# EAGLE board PowerBoard (EAGLE 9.2.1)
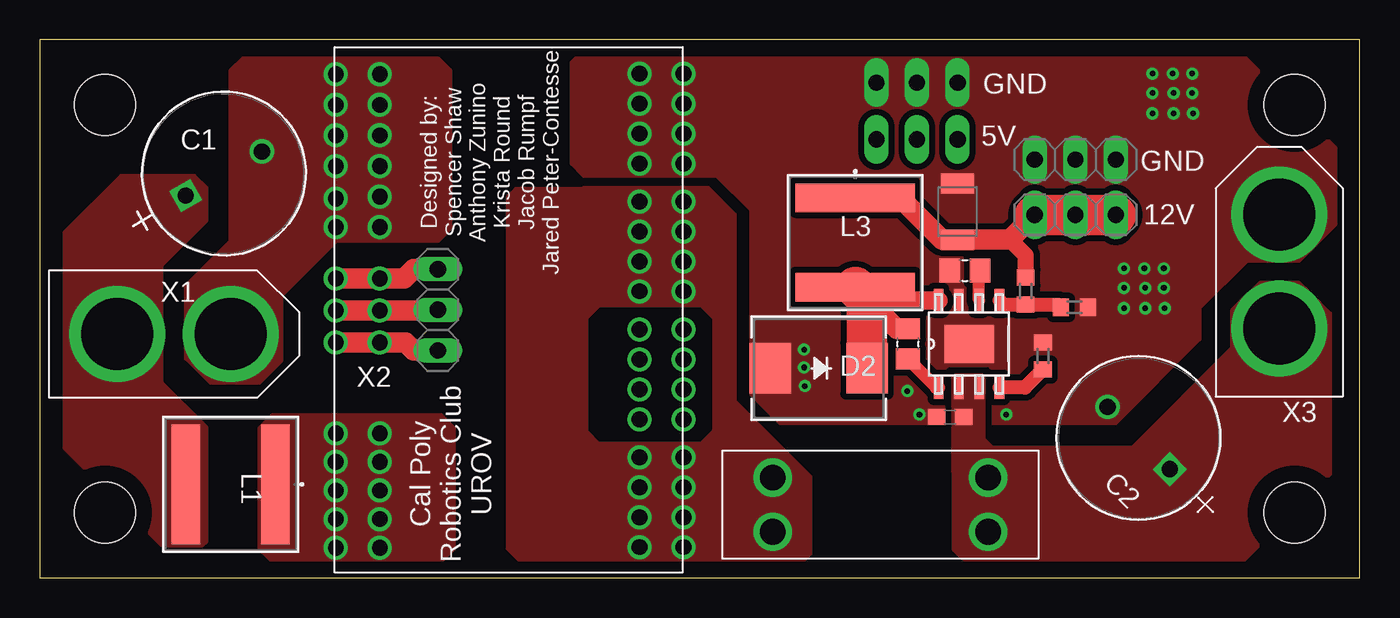
[diagram p0: board, top side]
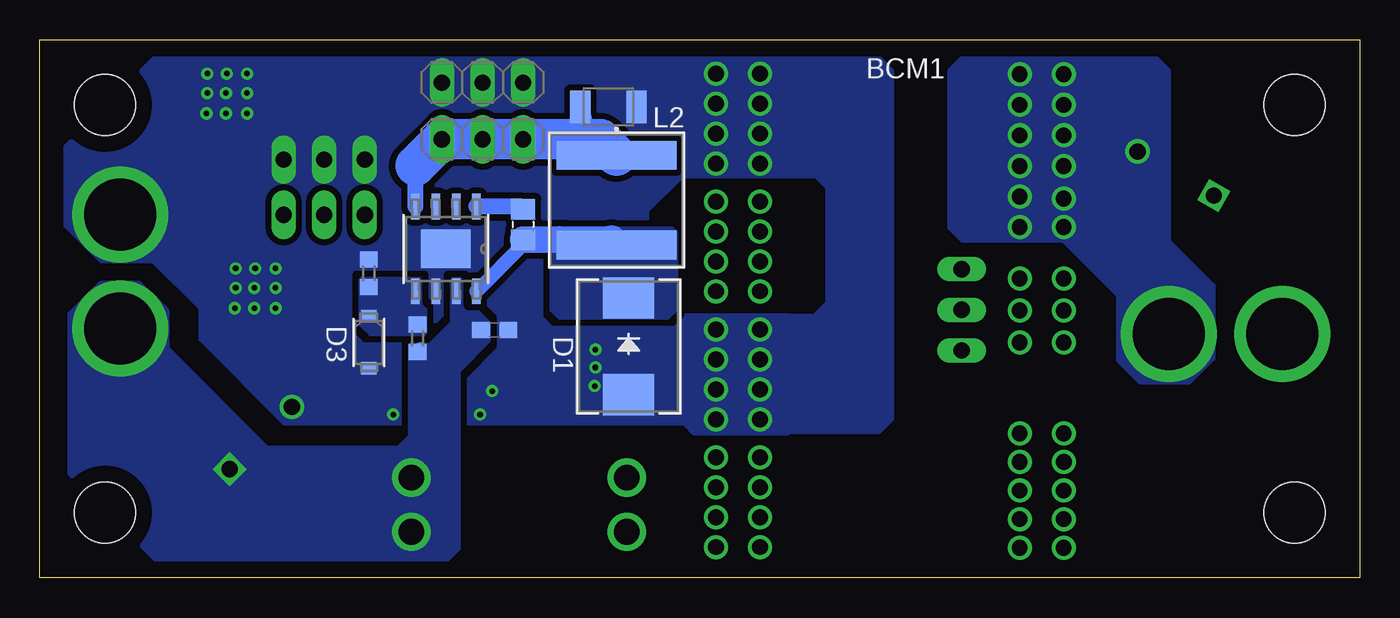
[diagram p1: board, bottom side, seen from below]

Size 82.55 x 33.66 mm. Coordinates in mm from the lower left corner, seen from the top.
Outline: 0,0 82.55,0 82.55,33.66 0,33.66 0,0
Copper layers (1*16): Top 0.035mm / dielectric 1.5mm / Bottom 0.035mm
Design rules "default": minimum track width 6mil, minimum drill 0.35mm, track to track 6mil, track to pad 6mil, pad to pad 6mil, via to via 6mil, smd to smd 6mil, copper to edge 40mil, drill to drill 6mil, minimum pad ring 10mil, minimum via ring 8mil, stop-mask expansion 4mil, vias tented up to drill 0mil, thermal gap 10mil
Net classes: 0 default: width 0.61 mm, clearance 0.381 mm; 1 V48: width 2.54 mm, clearance 0.381 mm; 2 V24: width 0.889 mm, clearance 0.381 mm; 3 V12: width 0.762 mm, clearance 0.381 mm; 4 V5: width 0.889 mm, clearance 0.381 mm; 5 GND_IN: width 2.54 mm, clearance 0.381 mm; 6 GND_OUT: width 0.406 mm, clearance 0.381 mm
Holes 3.81 mm at 4.06,29.59 4.06,4.06 78.49,4.06 78.49,29.59

## Footprints (pad centres in the part's own frame; a part is rotated, then mirrored left to right if it is on the bottom)
TE_9-146281-0 = drill 1.016 long: 1 1.27,0; 2 3.81,0; 3 6.35,0
BCM48BT24T = drill 0.99 pad 1.5: P$1 7.95,14.89; P$2 10.7,14.89; P$3 10.7,13.1; P$4 7.95,13.1; P$5 10.7,11.31; P$6 7.95,11.31; P$7 10.719,9.52; P$8 7.95,9.52; P$9 10.7,7.73; P$10 7.95,7.73; P$11 -11.04,14.85; P$12 -8.29,14.85; P$13 -11.04,12.98; P$14 -8.29,12.98; P$15 -11.04,11.11; P$16 -8.29,11.11; P$17 -11.04,9.24; P$18 -8.29,9.24; P$19 -11.04,6.85; P$20 -8.29,6.85; P$21 -11.04,4.98; P$22 -8.29,4.98; P$23 -11.04,3.11; P$24 -8.29,3.11; P$25 -11.04,1.24; P$26 -8.29,1.24; P$27 -11.04,-1.16; P$28 -8.29,-1.16; P$29 -11.04,-3.03; P$30 -8.29,-3.03; P$31 -11.04,-4.9; P$32 -8.29,-4.9; P$33 -11.04,-6.77; P$34 -8.29,-6.77; P$35 -11.04,-9.16; P$36 -8.29,-9.16; P$37 -11.04,-11.03; P$38 -8.29,-11.03; P$39 -11.04,-12.9; P$40 -8.29,-12.9; P$41 -11.04,-14.77; P$42 -8.29,-14.77; P$43 10.7,2.04; P$44 7.95,2.04; P$45 10.7,0.04; P$46 7.95,0.04; P$47 10.7,-1.96; P$48 7.95,-1.96; P$49 10.7,-5.17; P$50 7.95,-5.17; P$51 10.7,-6.96; P$52 7.95,-7.09; P$53 10.7,-9; P$54 7.95,-9; P$55 10.7,-10.92; P$56 7.95,-10.92; P$57 10.7,-12.83; P$58 7.95,-12.83; P$59 10.7,-14.75; P$60 7.95,-14.75
PCAP_10X20-THRU-ELECT = drill 1.016 pad 1.524 square: 1 -2.972,0 | drill 1.016 pad 1.524: 2 2.54,0
0603 = smd 1.1 x 1: 1 -0.85,0; 2 0.85,0
CAPC2012X135N = smd 1.3 x 1.5: 1 -0.95,0; 2 0.95,0
1210 = smd 1.27 x 2.06: 1 -1.755,0; 2 1.755,0
SMC-M = smd 2.587 x 3.18: 1 -3.026,0; 2 3.026,0
MINI2-F3-B = smd 0.762 x 0.991: 1 -1.626,0; 2 1.626,0
FUSE_3557-2 = drill 1.6: 1 -6.735,1.7; 2 -6.735,-1.7; 3 6.735,1.7; 4 6.735,-1.7
IND_TAIYO_NRS8040 = smd 1.791 x 7.493: 1 -2.8,0; 2 2.8,0
R0603 = smd 1 x 1.1: 1 -0.85,0; 2 0.85,0
MRA08B = smd 1.6 x 0.533: 1 -2.654,1.905; 2 -2.654,0.635; 3 -2.654,-0.635; 4 -2.654,-1.905; 5 2.654,-1.905; 6 2.654,-0.635; 7 2.654,0.635; 8 2.654,1.905 | smd 2.413 x 3.099: 9 0,0
DDA0008E_N = smd 1.45 x 0.6: 1 -2.725,1.905; 2 -2.725,0.635; 3 -2.725,-0.635; 4 -2.725,-1.905; 5 2.725,-1.905; 6 2.725,-0.635; 7 2.725,0.635; 8 2.725,1.905 | smd 2.4 x 3.1: 9 0,0
XT60 = drill 4.5 pad 6: X+ 0,-3.56; X- 0,3.56

## Placement (x,y rotation side)
12V  9-146281-0  [TE_9-146281-0]  60.96,22.71 0 top
BCM1  BCM48BT24T  [BCM48BT24T]  29.21,16.76 180 top
C1  UPW1J221MPD  [PCAP_10X20-THRU-ELECT]  11.68,25.4 30 top
C2  UPW1J221MPD  [PCAP_10X20-THRU-ELECT]  68.58,8.89 135 top
C3  4.7uF  [0603]  54.1,15.49 0 bottom
C4  100nF  [CAPC2012X135N]  52.32,22.1 270 bottom
C5  100uF  [1210]  46.99,29.46 0 bottom
C6  4.7uF  [0603]  56.95,10.06 180 top
C7  10nF  [CAPC2012X135N]  57.86,19.23 0 top
C8  100nF  [CAPC2012X135N]  54.31,14.63 90 top
C10  100uF  [1210]  57.4,22.91 90 top
D1  B540C-13-FSMC-M  [SMC-M]  45.72,14.48 270 bottom
D2  B540C-13-FSMC-M  [SMC-M]  48.72,13.11 180 top
D3  DZ2W03900L  [MINI2-F3-B]  61.98,14.73 270 bottom
F1  3557-2  [FUSE_3557-2]  52.58,4.57 0 top
GND  9-146281-0  [TE_9-146281-0]  60.96,26.16 0 top
L1  NRS8040T1R4NJGJ  [IND_TAIYO_NRS8040]  11.94,5.84 180 top
L2  NRS8040T1R4NJGJ  [IND_TAIYO_NRS8040]  46.48,23.62 270 bottom
L3  NRS8040T1R4NJGJ  [IND_TAIYO_NRS8040]  51,20.98 270 top
R1  10k  [R0603]  62.74,13.87 270 top
R2  150k  [R0603]  61.67,17.93 90 top
R3  10k  [R0603]  64.72,16.92 180 top
R4  10k  [R0603]  61.98,19.05 270 bottom
R5  68k  [R0603]  58.93,14.99 270 bottom
U1  LM22676MRE-5.0/NOPB  [MRA08B]  57.15,20.57 270 bottom
U2  LMR14050  [DDA0008E_N]  58.12,14.63 90 top
X1  XT60  [XT60]  8.38,15.24 270 top
X2  9-146281-0  [TE_9-146281-0]  24.89,12.95 90 top
X3  XT60  [XT60]  77.52,19.15 0 top
X4  9-146281-0  [TE_9-146281-0]  58.67,27.43 0 bottom
X5  9-146281-0  [TE_9-146281-0]  58.67,30.99 0 bottom

## Library data of the parts
12V GND X2 X4 X5 = header_connector; AVAILABILITY: Good; CENTERLINE_PITCH: 2.54 mm[.1 in]; COMMENT: 9-146281-0; DESCRIPTION: 40 MODII HDR SRST B/A .100CL; EU_ROHS_COMPLIANCE: Compliant; LINK: http://www.te.com/usa-en/product-9-146281-0.html; MF: TE Connectivity; MP: 9-146281-0; NUMBER_OF_POSITIONS: 40; PACKAGE: FakePackage u; PRICE: 2.90 USD; PRODUCT_TYPE: Connector
BCM1 = BCM48BT24
C1 C2 = CAP220uFTH; MANUFACTURER_PART_NUMBER: UPW1J221MPD; VENDOR: Nichicon
C3 C6 = SparkFun-Capacitors; PROD_ID: CAP-08280
C4 C7 C8 = GRM21BR60E107ME15L; AVAILABILITY: Unavailable; DESCRIPTION: Cap Ceramic 100uF 2.5V X5R 20% SMD 0805 85°C Embossed Plastic T/R; MF: Murata Electronics; MP: GRM21BR60E107ME15L; PACKAGE: 0805 Murata; PRICE: 0.64 USD
C5 C10 = SparkFun-Capacitors; PROD_ID: CAP-09824
D1 D2 = DIO_B540C-13-FSMC; MANUFACTURER_PART_NUMBER: B540C13F; VENDOR: Diodes Inc
D3 = 3.9V_Zener_Diode; MANUFACTURER_PART_NUMBER: DZ2W03900L; VENDOR: Panasonic
F1 = Fuse Holder 3557-2; AVAILABILITY: Good; DESCRIPTION: Clip; Auto Clips & Holders; 2-1 Holder For Standard & Low Profile Mini Fuses; MF: Keystone; MP: 3557-2; PACKAGE: None; PRICE: 0.82 USD
L1-L3 = IND_smd_1uH_6A; MANUFACTURER_PART_NUMBER: NRS8040T1R4NJGJ; VENDOR: TAIYO YUDEN
R1-R5 = resistor
U1 = LM2267; MANUFACTURER_PART_NUMBER: LM22676MRE5.0NOPB; VENDOR: National Semiconductor
U2 = 24vto12v; APPLICATION_BUILDNUMBER: *; COMPTYPE: IC; MANUFACTURER: Texas Instruments; MANUFACTURER_NAME: Texas Instruments; MANUFACTURER_PART_NUMBER: LMR14050SDDAR; MOUNTTYPE: SMT; PACKAGEREFERENCE: DDA0008E; PARTNUMBER: LMR14050SDDAR; PIN_COUNT: 9; REFDES: RefDes; ROHS: Y; TYPE: TYPE
X1 X3 = XT60

## Nets
5V_BOOT [V5]: C4.1 U1.1
5V_EN [V5]: D3.1 R4.2 R5.1 U1.5
5V_IND [V5]: C4.2 D1.1 L2.2 U1.8
5V_OUT [V5]: C5.1 L2.1 U1.4 X4.1 X4.2 X4.3
12V_BOOT [V12]: C8.1 U2.1
12V_FB [V12]: R2.1 R3.2 U2.5
12V_OUT [V12]: 12V.1 12V.2 12V.3 C10.1 L3.1 R2.2
12V_RT_SYNC [V12]: R1.2 U2.4
12V_SS [V12]: C7.2 U2.6
12V_SW [V12]: C8.2 D2.1 L3.2 U2.8
24V_OUT [V24]: C2.1 C3.1 C6.1 F1.3 F1.4 R5.2 U1.7 U2.2 U2.3 X3.X+
48V_IN [V48]: C1.1 L1.2 X1.X+
48V_PC: BCM1.P$43 BCM1.P$44 X2.1
48V_RSV: BCM1.P$45 BCM1.P$46 X2.2
48V_TM: BCM1.P$47 BCM1.P$48 X2.3
BUCK24_OUT [V24]: BCM1.P$11 BCM1.P$12 BCM1.P$13 BCM1.P$14 BCM1.P$15 BCM1.P$16 BCM1.P$17 BCM1.P$18 BCM1.P$27 BCM1.P$28 BCM1.P$29 BCM1.P$30 BCM1.P$31 BCM1.P$32 BCM1.P$33 BCM1.P$34 F1.1 F1.2
BUCK48_IN [V48]: BCM1.P$1 BCM1.P$2 BCM1.P$3 BCM1.P$4 BCM1.P$5 BCM1.P$6 BCM1.P$7 BCM1.P$8 BCM1.P$9 BCM1.P$10 L1.1
GND_IN [GND_IN]: BCM1.P$49 BCM1.P$50 BCM1.P$51 BCM1.P$52 BCM1.P$53 BCM1.P$54 BCM1.P$55 BCM1.P$56 BCM1.P$57 BCM1.P$58 BCM1.P$59 BCM1.P$60 C1.2 X1.X-
GND_OUT [GND_OUT]: BCM1.P$19 BCM1.P$20 BCM1.P$21 BCM1.P$22 BCM1.P$23 BCM1.P$24 BCM1.P$25 BCM1.P$26 BCM1.P$35 BCM1.P$36 BCM1.P$37 BCM1.P$38 BCM1.P$39 BCM1.P$40 BCM1.P$41 BCM1.P$42 C2.2 C3.2 C5.2 C6.2 C7.1 C10.2 D1.2 D2.2 D3.2 GND.1 GND.2 GND.3 R1.1 R3.1 R4.1 U1.6 U1.9 U2.7 U2.9 X3.X- X5.1 X5.2 X5.3

## Tracks (layer width: path | path; a pad name or v marks a point on that pad's centre or on a via)
5V_BOOT
  Bottom 1.016: C4.1 52.5,23.23 U1.1
5V_EN
  pour Bottom (no thermals): 58.42,15.34 58.42,16.31 58.42,16.76 58.72,17.07 58.72,18.59 58.83,18.69 62.43,18.69 62.53,18.59 62.53,15.9 62.43,15.8 61.87,15.24 58.62,15.24 58.52,15.24
5V_IND
  Bottom 0.889: 52.32,20.84 U1.8
  Bottom 1.016: C4.2 52.32,20.84
  Bottom 1.651: C4.2 46.81,21.15
  Bottom 1.778: 46.81,21.15 L2.2
  pour Bottom (no thermals): 49.99,21.89 43.03,21.89 42.77,21.64 42.77,16.76 43.28,16.26 50.04,16.26 50.55,16.76 50.55,21.34 arc90
5V_OUT
  Bottom 1.016: U1.4 59.05,25.78 | C5.1 48.24,27.43 47.49,27.43
  Bottom 2.54: L2.1 47.49,27.43 X4.3 X4.2 X4.1 59.05,25.78
12V_BOOT
  Top 0.813: U2.1 56.08,11.9 C8.1
12V_FB
  Top 0.889: U2.5 60.29,17.08 R2.1 63.7,17.08 R3.2
12V_OUT
  Top 1.016: R2.2 61.67,20.16 60.68,21.16
  Top 1.27: 12V.1 60.68,21.16 C10.1 56.42,21.16 53.79,23.78 L3.1
  Top 2.54: 12V.1 12V.2 12V.3
12V_RT_SYNC
  Top 0.889: R1.2 61.62,11.9 U2.4
12V_SS
  Top 0.762: U2.6 58.75,19.17 C7.2
12V_SW
  Top 1.143: U2.8 51.83,17.36
  Top 1.27: C8.2 53.6,15.58 L3.2 51.83,17.36
  Top 2.54: L3.2 51.74,17.44 D2.1
24V_OUT
  Bottom 0.889: R5.2 58.78,14.29
  pour Bottom (no thermals): 56.34,1.83 56.34,6.55 57.91,8.13 68.33,8.13 74.57,14.38 74.57,16.71 76.3,18.44 78.79,18.44 80.72,16.51 80.72,6.5 75.23,1.02 57.15,1.02
  pour Top (no thermals): 68.33,8.13 57.91,8.13 57.15,7.37 57.15,1.78 57.91,1.02 75.23,1.02 80.72,6.5 80.72,16.51 78.79,18.44 76.3,18.44 74.57,16.71 74.57,14.38
  pour Bottom (no thermals): 54.46,14.83 54.46,15.95 55.12,16.61 55.88,16.61 56.18,16.92 56.18,18.59 56.29,18.69 56.69,18.69 56.79,18.59 56.79,15.95 58.17,14.58 59.39,14.58 59.39,13.61 58.72,12.95 56.34,12.95
  pour Bottom (no thermals): 56.34,6.15 56.34,14.33 56.59,14.58 59.33,14.58 59.44,14.48 59.44,8.84 60.91,7.37 60.91,6.96 59.08,5.13 57.35,5.13
  pour Top (no thermals): 57.15,11.28 57.15,12.55 57.2,12.6 57.3,12.7 58.88,12.7 59.03,12.55 59.03,12.5 59.03,8.69 59.59,8.13 59.59,6.55 59.28,6.25 57.51,6.25 57.15,6.6
48V_IN
  pour Top (no thermals): 10.41,22.35 10.41,24.38 9.65,25.15 5.08,25.15 1.52,21.59 1.52,8.13 7.62,2.03 10.16,2.03 10.41,2.29 10.41,9.4 7.62,12.19 7.62,19.56
48V_PC
  Top 1.27: BCM1.P$43 BCM1.P$44 22.87,14.72 23.37,14.22 X2.1
48V_RSV
  Top 1.27: BCM1.P$45 BCM1.P$46 24.85,16.72 X2.2
48V_TM
  Top 1.27: BCM1.P$47 BCM1.P$48 22.79,18.72 23.37,19.3 X2.3
BUCK24_OUT
  pour Top (no thermals): 48.21,6.3 43.48,11.02 43.48,22.71 41.81,24.38 34.04,24.38 33.27,23.62 33.27,17.78 33.99,17.07 41.35,17.07 42.16,16.26 42.16,9.19 41.35,8.38 34.04,8.38 33.27,7.62 33.27,1.83 34.04,1.07 47.75,1.07 48.21,1.52
  pour Top: 40.64,24.33 29.77,24.33 29.26,23.83 29.26,1.83 30.02,1.07 40.84,1.07 41.35,1.57 41.35,7.57 40.54,8.38 34.95,8.38 34.19,9.14 34.19,16.26 35,17.07 40.69,17.07 41.45,17.83 41.45,23.52
BUCK48_IN
  pour Top (no thermals): 25.91,1.83 25.91,9.35 25.1,10.16 14.53,10.16 13.72,9.35 13.72,1.83 14.53,1.02 25.1,1.02
GND_IN
  pour Top (no thermals): 12.7,32.51 24.89,32.51 25.65,31.75 25.65,21.84 24.89,21.08 18.54,21.08 15.09,17.63 15.09,13.56 13.72,12.19 10.67,12.19 9.14,13.72 9.14,18.29 11.94,21.08 11.94,31.75
  pour Bottom (no thermals): 12.75,32.56 11.94,31.75 11.94,21.08 9.14,18.29 9.14,13.72 10.67,12.19 13.72,12.19 15.09,13.56 15.09,17.63 18.54,21.08 24.84,21.08 25.65,21.89 25.65,31.75 24.84,32.56
GND_OUT  (via drill 0.35)
  other vias: 47.85,11.99 47.8,13.16 47.8,14.27 54.25,11.68 55.02,10.21 69.6,31.55 70.87,31.55 72.09,31.55 69.6,30.33 70.92,30.33 72.09,30.33 69.6,29.06 70.92,29.06 72.14,29.06 67.82,19.35 69.09,19.35 70.31,19.35 67.82,18.14 69.14,18.14 70.31,18.14 67.82,16.87 69.14,16.87 70.36,16.87 60.45,10.21
  pour Bottom (isolate 0.254, rank 2, no thermals): 42.37,25.15 34.04,25.15 33.27,25.91 33.27,32.26 34.04,33.02 74.93,33.02 80.98,26.97 80.98,22.05 78.74,19.81 75.49,19.81 72.54,16.87 72.54,14.94 67.26,9.65 42.27,9.65 41.66,9.04 35.76,9.04 34.95,9.86 34.95,15.7 35.66,16.41 43.74,16.41 44.55,17.22 44.55,22.96
  pour Top (isolate 0.254, rank 3, no thermals): 42.37,25.15 34.04,25.15 33.27,25.91 33.27,32.26 34.04,33.02 74.93,33.02 81.03,26.92 81.03,22.1 78.74,19.81 75.49,19.81 72.54,16.87 72.54,14.94 67.26,9.65 46.33,9.65 44.5,11.48 44.5,23.01
  pour Bottom: 38.76,25.2 38.76,32.55 30.11,32.6 29.26,31.75 29.26,9.91 30.07,9.09 35.76,9.09 36.17,9.5 36.17,16.41 34.09,16.41 33.27,17.22 33.27,24.38 34.09,25.2

## Text on the board
tPlace: 5V | Designed by: / Spencer Shaw / Anthony Zunino / Krista Round / Jacob Rumpf / Jared Peter-Contesse | GND | Cal Poly / Robotics Club / UROV
tSilk: Power Board Rev 2